# EAGLE board final (EAGLE 5.01)
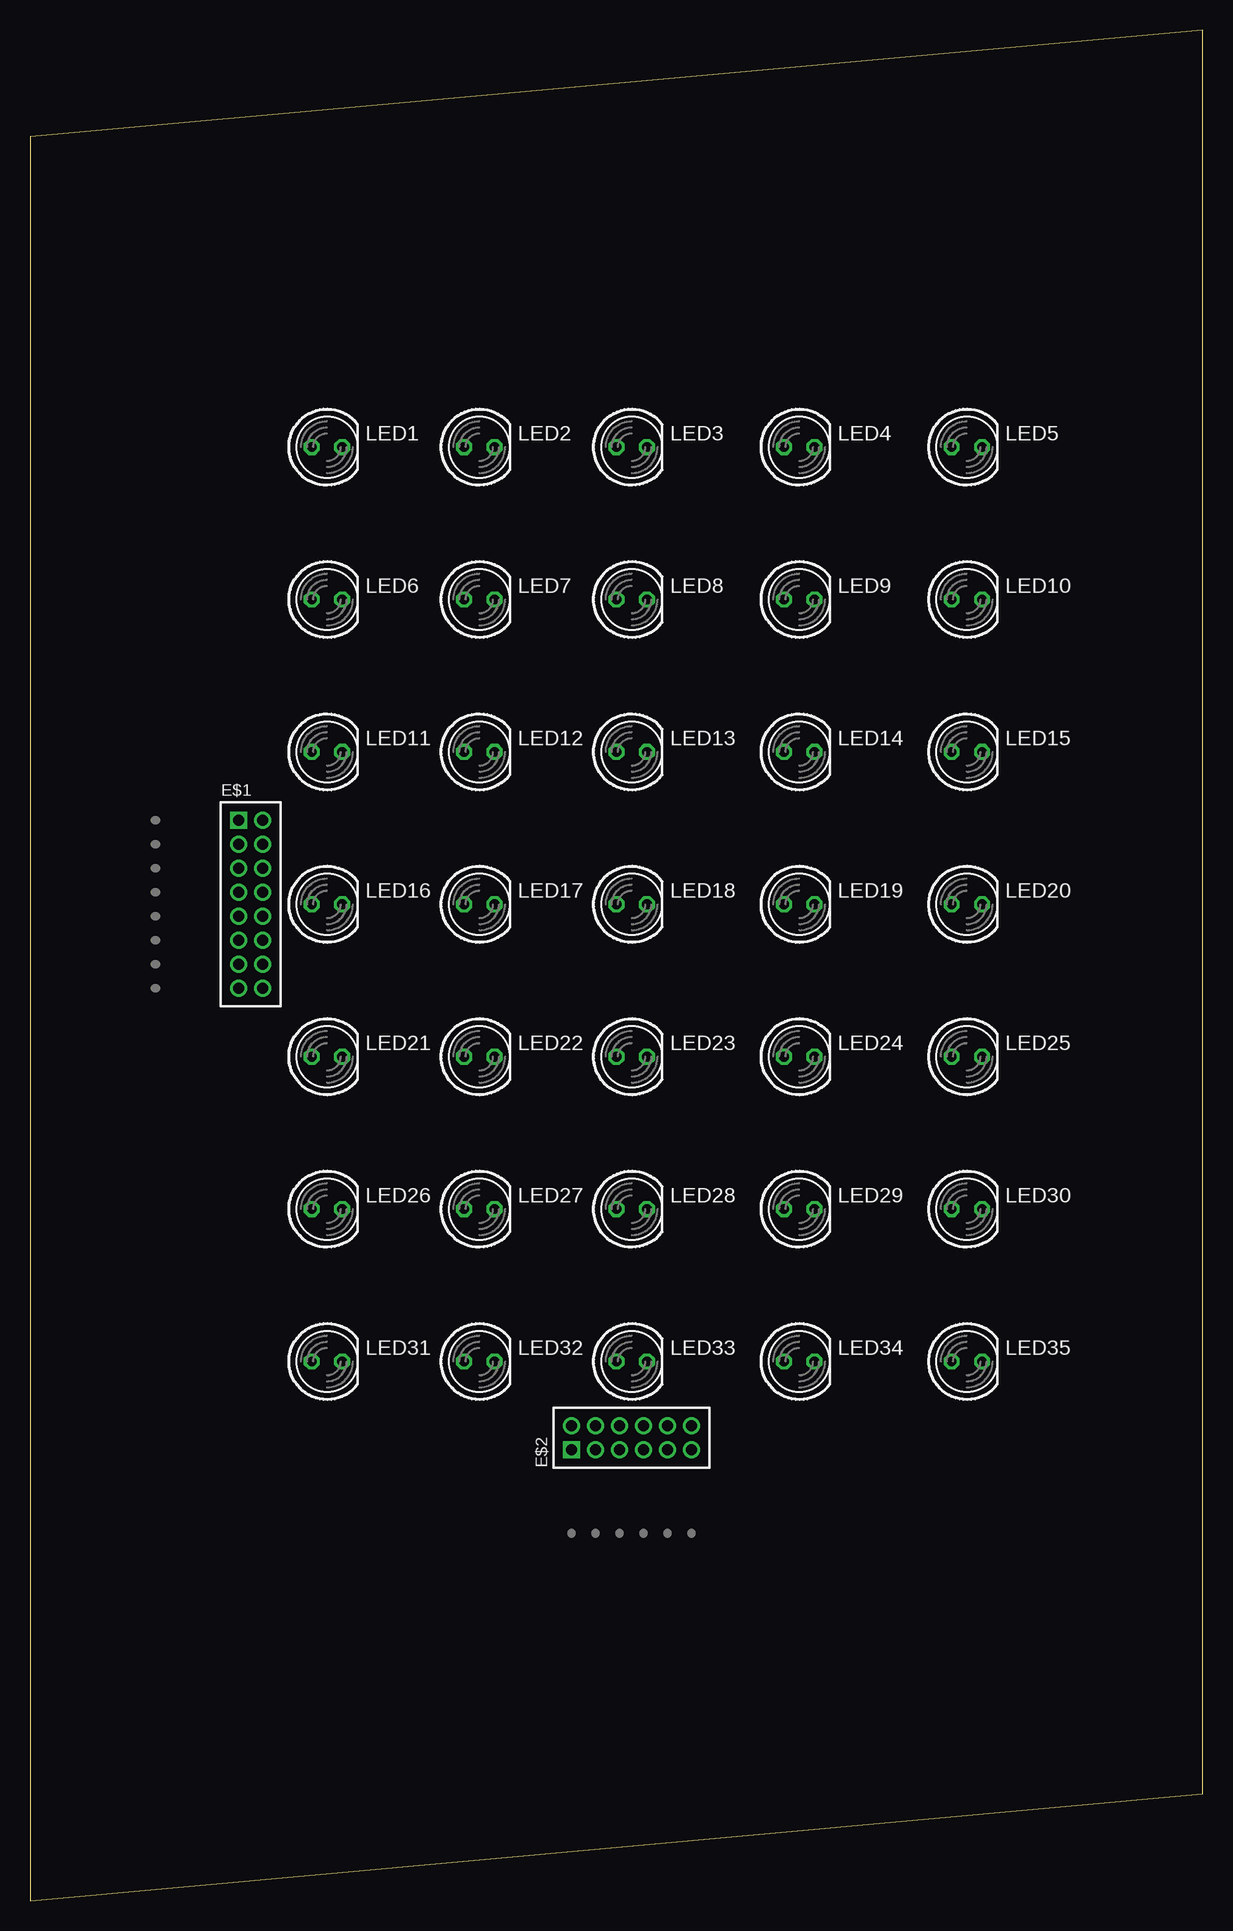
[diagram p0: board, top side]
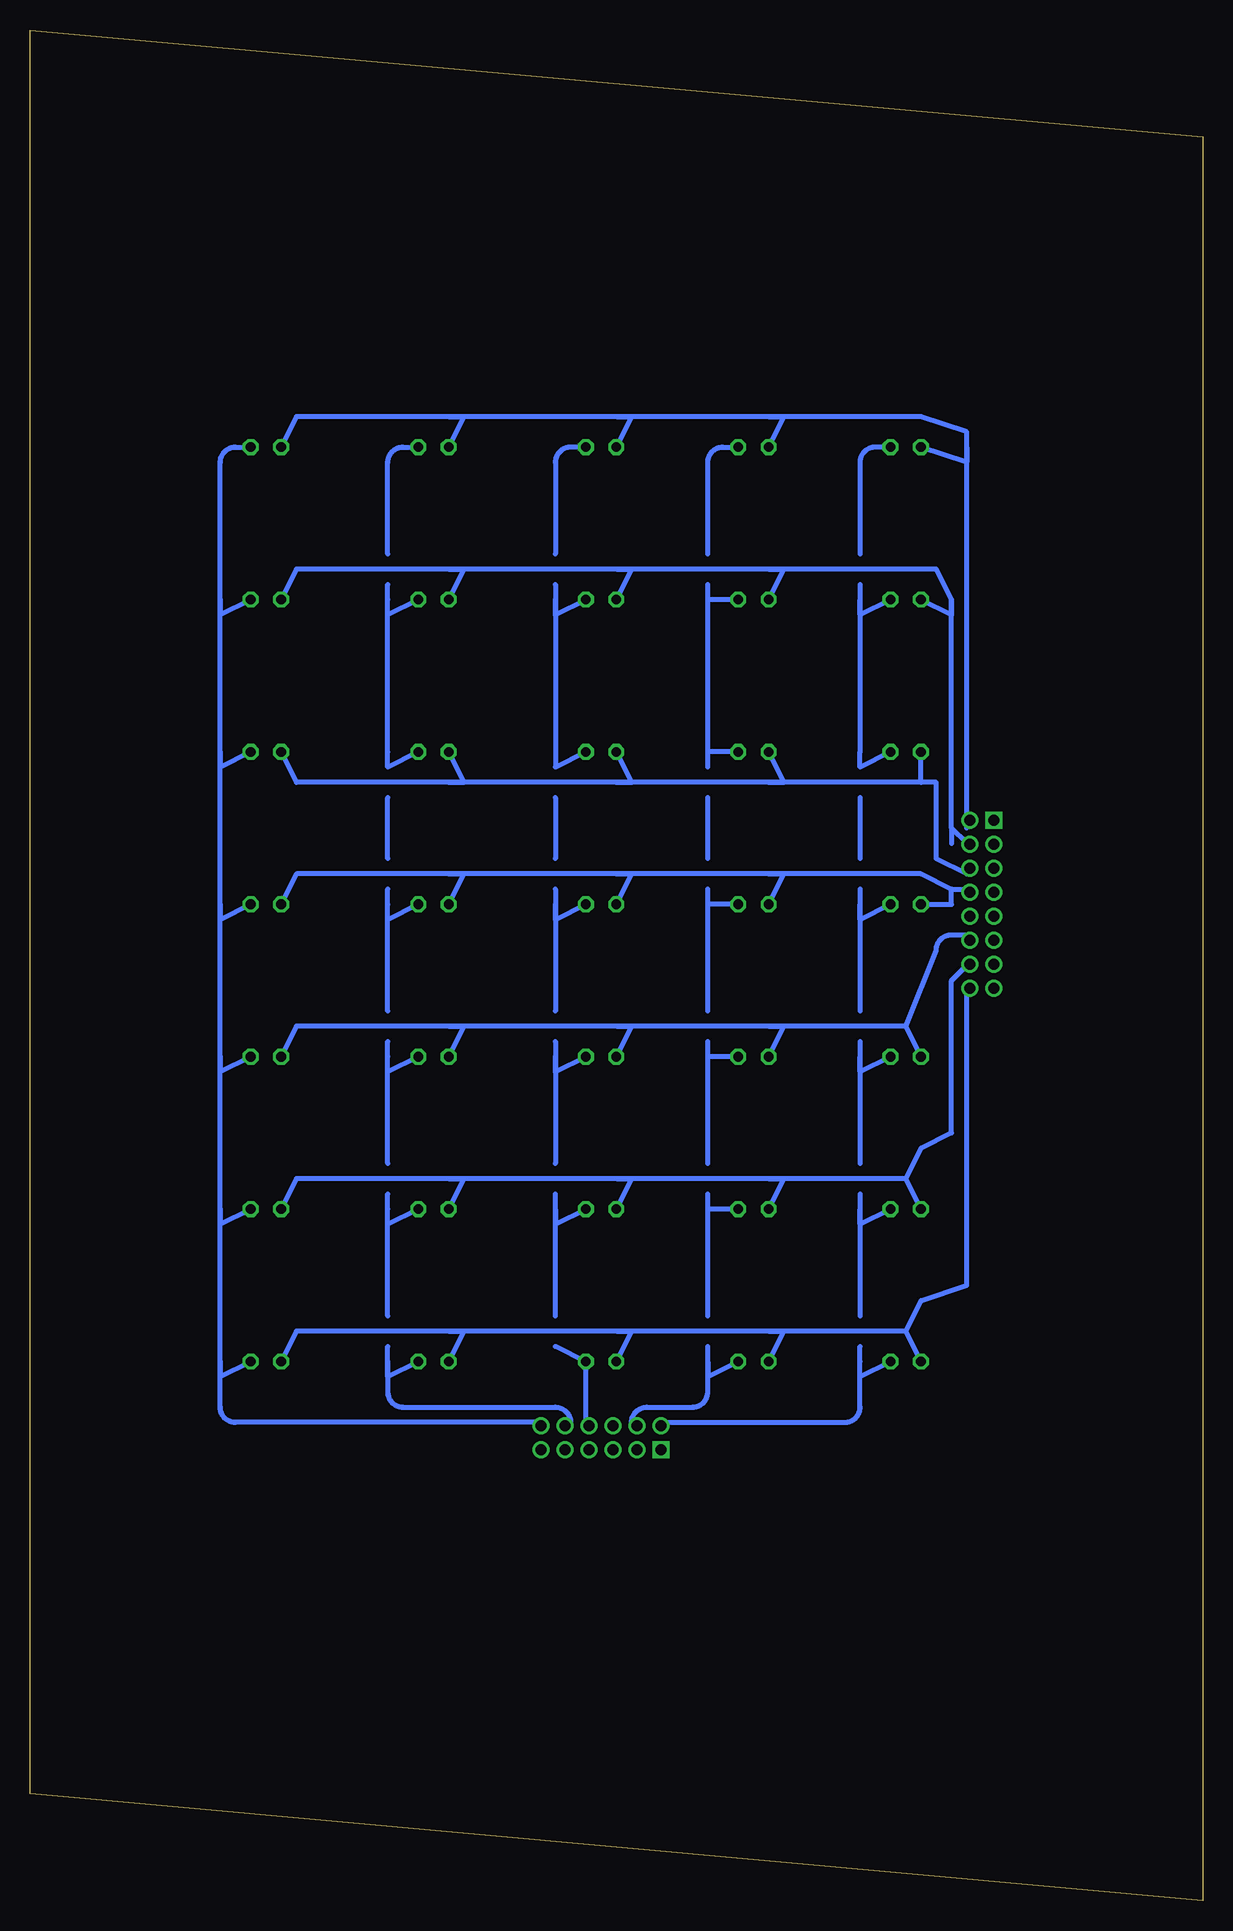
[diagram p1: board, bottom side, seen from below]

Size 97.77 x 155.88 mm. Coordinates in mm from the lower left corner, seen from the top.
Outline: 0,0 97.77,8.89 97.77,155.88 0,146.99 0,0
Copper layers (1*16): Top 0.035mm / dielectric 1.5mm / Bottom 0.035mm
Design rules "default *": minimum track width 10mil, minimum drill 24mil, track to track 8mil, track to pad 8mil, pad to pad 8mil, via to via 8mil, smd to smd 8mil, copper to edge 40mil, drill to drill 8mil, minimum pad ring 10mil, minimum via ring 8mil, stop-mask expansion 4mil, vias tented up to drill 0mil, thermal gap 10mil

## Footprints (pad centres in the part's own frame; a part is rotated, then mirrored left to right if it is on the bottom)
87760-16 = drill 0.914 square: 1 -7,-1 | drill 0.914 round: 2 -7,1; 3 -5,-1; 4 -5,1; 5 -3,-1; 6 -3,1; 7 -1,-1; 8 -1,1; 9 1,-1; 10 1,1; 11 3,-1; 12 3,1; 13 5,-1; 14 5,1; 15 7,-1; 16 7,1
87760-12 = drill 0.914 square: 1 -5,-1 | drill 0.914 round: 2 -5,1; 3 -3,-1; 4 -3,1; 5 -1,-1; 6 -1,1; 7 1,-1; 8 1,1; 9 3,-1; 10 3,1; 11 5,-1; 12 5,1
LED5MM = drill 0.813 octagon: A -1.27,0; K 1.27,0

## Placement (x,y rotation side)
E$1  [87760-16]  18.41,83.02 270 top
E$2  [87760-12]  50.16,38.57 0 top
LED1  [LED5MM]  24.76,121.12 0 top
LED2  [LED5MM]  37.46,121.12 0 top
LED3  [LED5MM]  50.16,121.12 0 top
LED4  [LED5MM]  64.13,121.12 0 top
LED5  [LED5MM]  78.1,121.12 0 top
LED6  [LED5MM]  24.76,108.42 0 top
LED7  [LED5MM]  37.46,108.42 0 top
LED8  [LED5MM]  50.16,108.42 0 top
LED9  [LED5MM]  64.13,108.42 0 top
LED10  [LED5MM]  78.1,108.42 0 top
LED11  [LED5MM]  24.76,95.72 0 top
LED12  [LED5MM]  37.46,95.72 0 top
LED13  [LED5MM]  50.16,95.72 0 top
LED14  [LED5MM]  64.13,95.72 0 top
LED15  [LED5MM]  78.1,95.72 0 top
LED16  [LED5MM]  24.76,83.02 0 top
LED17  [LED5MM]  37.46,83.02 0 top
LED18  [LED5MM]  50.16,83.02 0 top
LED19  [LED5MM]  64.13,83.02 0 top
LED20  [LED5MM]  78.1,83.02 0 top
LED21  [LED5MM]  24.76,70.32 0 top
LED22  [LED5MM]  37.46,70.32 0 top
LED23  [LED5MM]  50.16,70.32 0 top
LED24  [LED5MM]  64.13,70.32 0 top
LED25  [LED5MM]  78.1,70.32 0 top
LED26  [LED5MM]  24.76,57.62 0 top
LED27  [LED5MM]  37.46,57.62 0 top
LED28  [LED5MM]  50.16,57.62 0 top
LED29  [LED5MM]  64.13,57.62 0 top
LED30  [LED5MM]  78.1,57.62 0 top
LED31  [LED5MM]  24.76,44.92 0 top
LED32  [LED5MM]  37.46,44.92 0 top
LED33  [LED5MM]  50.16,44.92 0 top
LED34  [LED5MM]  64.13,44.92 0 top
LED35  [LED5MM]  78.1,44.92 0 top

## Library data of the parts
E$1 E$2 = con-molex-milli-grid
LED1-LED35 = led

## Nets
S$1: LED1.K
S$2: LED6.A LED7.A LED8.A LED9.A LED10.A
S$3: LED5.K LED10.K LED15.K LED20.K LED25.K LED30.K LED35.K
S$4: LED16.A LED17.A LED18.A LED19.A LED20.A
S$5: LED33.K
S$6: LED26.A LED27.A LED28.A LED29.A LED30.A
S$7: LED21.A LED22.A LED23.A LED24.A LED25.A
S$8: LED31.K
S$9: LED32.K
S$10: LED11.A LED12.A LED13.A LED14.A LED15.A
S$11: LED34.K
S$13: LED1.A LED2.A LED3.A LED4.A LED5.A
S$14: LED6.K LED11.K
S$16: LED16.K
S$17: LED21.K
S$18: LED26.K
S$19: LED27.K
S$20: LED22.K
S$21: LED17.K
S$23: LED7.K LED12.K
S$24: LED2.K
S$25: LED3.K
S$26: LED8.K LED13.K
S$28: LED18.K
S$29: LED23.K
S$30: LED28.K
S$31: LED29.K
S$32: LED24.K
S$33: LED19.K
S$35: LED9.K LED14.K
S$36: LED4.K
S$37: LED31.A LED32.A LED33.A LED34.A LED35.A

## Tracks (layer width: path | path; a pad name or v marks a point on that pad's centre or on a via)
S$1
  Bottom 0.406: LED1.K 27.3,121.12 arc-90 28.57,119.85 28.57,112.23
S$2
  Bottom 0.406: 20.95,108.42 22.22,110.96 36.19,110.96 | 20.95,89.37 20.95,108.42 | 19.68,88.1 20.95,89.37 | 20.95,89.37 20.95,88.1 | 36.19,110.96 48.89,110.96 | 48.89,110.96 62.86,110.96 | 62.86,110.96 75.56,110.96 LED10.A | 62.86,110.96 61.59,110.96 LED9.A | 48.89,110.96 47.62,110.96 LED8.A | 36.19,110.96 34.92,110.96 LED7.A | 20.95,108.42 20.95,107.15 LED6.A
S$3
  Bottom 0.406: 81.91,108.42 81.91,119.85 arc90 80.64,121.12 LED5.K | 81.91,108.42 81.91,107.15 LED10.K | 81.91,95.72 81.91,108.42 | 81.91,95.72 81.91,94.45 LED15.K | 81.91,83.02 81.91,95.72 | 81.91,83.02 81.91,81.75 LED20.K | 81.91,70.32 81.91,83.02 | 81.91,70.32 81.91,69.05 LED25.K | 81.91,57.62 81.91,70.32 | 81.91,57.62 81.91,56.35 LED30.K | 81.91,44.92 81.91,43.65 LED35.K | 81.91,44.92 81.91,57.62 | 55.24,39.84 80.64,39.84 arc90 81.91,41.11 81.91,44.92
S$4
  Bottom 0.406: 20.95,84.29 19.68,84.29 | 36.19,85.56 23.49,85.56 20.95,84.29 | 36.19,85.56 48.89,85.56 | 48.89,85.56 62.86,85.56 | 62.86,85.56 75.56,85.56 LED20.A | LED19.A 61.59,85.56 62.86,85.56 | LED18.A 47.62,85.56 48.89,85.56 | LED17.A 34.92,85.56 36.19,85.56 | LED16.A 20.95,83.02 20.95,84.29
S$5
  Bottom 0.406: 51.43,39.84 LED33.K 53.97,46.19
S$6
  Bottom 0.406: LED29.A 61.59,60.16 62.86,60.16 | LED30.A 75.56,60.16 62.86,60.16 | 19.68,77.94 20.95,76.67 20.95,63.97 23.49,62.7 24.76,60.16 | LED28.A 47.62,60.16 48.89,60.16 | LED27.A 34.92,60.16 36.19,60.16 | 48.89,60.16 62.86,60.16 | 36.19,60.16 48.89,60.16 | 24.76,60.16 36.19,60.16 | LED26.A 24.76,60.16
S$7
  Bottom 0.406: 19.68,80.48 20.95,80.48 arc-90 22.22,79.21 24.76,72.86 | LED21.A 24.76,72.86 | 24.76,72.86 36.19,72.86 | 36.19,72.86 48.89,72.86 | 48.89,72.86 62.86,72.86 | 62.86,72.86 75.56,72.86 LED25.A | LED24.A 61.59,72.86 62.86,72.86 | LED23.A 47.62,72.86 48.89,72.86 | LED22.A 34.92,72.86 36.19,72.86
S$8
  Bottom 0.406: LED31.K 28.57,43.65 28.57,44.92 | 45.08,39.84 29.84,39.84 arc-90 28.57,41.11 28.57,44.92 | 28.57,44.92 28.57,46.19
S$9
  Bottom 0.406: 47.62,39.84 arc90 46.35,41.11 42.54,41.11 arc-90 41.27,42.38 41.27,44.92 | 41.27,44.92 41.27,43.65 LED32.K | 41.27,44.92 41.27,46.19
S$10
  Bottom 0.406: 23.49,93.18 LED11.A | 23.49,93.18 36.19,93.18 | 36.19,93.18 48.89,93.18 | 48.89,93.18 62.86,93.18 | 62.86,93.18 75.56,93.18 LED15.A | 23.49,93.18 22.22,93.18 22.22,86.83 19.68,85.56 | 36.19,93.18 34.92,93.18 LED12.A | 48.89,93.18 47.62,93.18 LED13.A | 62.86,93.18 61.59,93.18 LED14.A
S$11
  Bottom 0.406: LED34.K 67.94,43.65 67.94,44.92 | 67.94,44.92 67.94,42.38 arc-90 66.67,41.11 53.97,41.11 arc90 52.7,39.84 | 67.94,44.92 67.94,46.19
S$13
  Bottom 0.406: LED5.A 75.56,123.66 62.86,123.66 | 19.68,121.12 19.68,122.39 23.49,123.66 36.19,123.66 | 19.68,89.37 19.68,121.12 | 48.89,123.66 62.86,123.66 | 36.19,123.66 48.89,123.66 | 36.19,123.66 34.92,123.66 LED2.A | 48.89,123.66 47.62,123.66 LED3.A | 62.86,123.66 61.59,123.66 LED4.A | 19.68,121.12 19.68,119.85 LED1.A
S$14
  Bottom 0.406: 28.57,109.69 28.57,108.42 | 28.57,108.42 28.57,95.72 28.57,94.45 LED11.K | LED6.K 28.57,107.15 28.57,108.42
S$15
  Bottom 0.406: 28.57,91.91 28.57,86.83
S$16
  Bottom 0.406: 28.57,84.29 28.57,83.02 | 28.57,83.02 28.57,74.13 | LED16.K 28.57,81.75 28.57,83.02
S$17
  Bottom 0.406: 28.57,71.59 28.57,70.32 | 28.57,70.32 28.57,61.43 | LED21.K 28.57,69.05 28.57,70.32
S$18
  Bottom 0.406: 28.57,58.89 28.57,57.62 | 28.57,57.62 28.57,48.73 | LED26.K 28.57,56.35 28.57,57.62
S$19
  Bottom 0.406: 41.27,48.73 41.27,57.62 | 41.27,57.62 41.27,58.89 | LED27.K 41.27,57.62
S$20
  Bottom 0.406: 41.27,61.43 41.27,70.32 | 41.27,70.32 41.27,71.59 | LED22.K 41.27,70.32
S$21
  Bottom 0.406: 41.27,74.13 41.27,83.02 | 41.27,83.02 41.27,84.29 | LED17.K 41.27,83.02
S$22
  Bottom 0.406: 41.27,86.83 41.27,91.91
S$23
  Bottom 0.406: 41.27,94.45 41.27,95.72 | 41.27,95.72 41.27,108.42 | 41.27,108.42 41.27,109.69 | LED12.K 41.27,95.72 | LED7.K 41.27,108.42
S$24
  Bottom 0.406: 41.27,112.23 41.27,119.85 arc90 40,121.12 LED2.K
S$25
  Bottom 0.406: LED3.K 52.7,121.12 arc-90 53.97,119.85 53.97,112.23
S$26
  Bottom 0.406: 53.97,109.69 53.97,108.42 | LED8.K 53.97,107.15 53.97,108.42 | LED13.K 53.97,94.45 53.97,108.42
S$27
  Bottom 0.406: 53.97,91.91 53.97,86.83
S$28
  Bottom 0.406: 53.97,84.29 53.97,83.02 | 53.97,83.02 53.97,74.13 | LED18.K 53.97,81.75 53.97,83.02
S$29
  Bottom 0.406: 53.97,71.59 53.97,70.32 | 53.97,70.32 53.97,61.43 | LED23.K 53.97,69.05 53.97,70.32
S$30
  Bottom 0.406: 53.97,48.73 53.97,57.62 | 53.97,57.62 53.97,58.89 | 53.97,57.62 53.97,56.35 LED28.K
S$31
  Bottom 0.406: 67.94,48.73 67.94,57.62 | 67.94,57.62 67.94,58.89 | LED29.K 67.94,56.35 67.94,57.62
S$32
  Bottom 0.406: 67.94,61.43 67.94,70.32 | 67.94,70.32 67.94,71.59 | LED24.K 67.94,69.05 67.94,70.32
S$33
  Bottom 0.406: 67.94,74.13 67.94,83.02 | 67.94,83.02 67.94,84.29 | LED19.K 67.94,81.75 67.94,83.02
S$34
  Bottom 0.406: 67.94,86.83 67.94,91.91
S$35
  Bottom 0.406: 67.94,108.42 67.94,95.72 67.94,94.45 LED14.K | 67.94,108.42 67.94,109.69 | LED9.K 67.94,107.15 67.94,108.42
S$36
  Bottom 0.406: 67.94,112.23 67.94,119.85 arc90 66.67,121.12 LED4.K
S$37
  Bottom 0.406: 19.68,75.4 19.68,51.27 23.49,50 24.76,47.46 | LED34.A 61.59,47.46 62.86,47.46 | LED35.A 75.56,47.46 62.86,47.46 | LED33.A 47.62,47.46 48.89,47.46 | LED32.A 34.92,47.46 36.19,47.46 | 48.89,47.46 62.86,47.46 | 36.19,47.46 48.89,47.46 | 24.76,47.46 36.19,47.46 | LED31.A 24.76,47.46